# Altium PCB 2017_Carte_RUSH.PcbDoc
Units mil, origin at the board's own origin, x right, y up, seen from the top; angles counter-clockwise.
Board outline 1900 x 2250 mil, 4 copper layers (1-TOP, 2-SIGNAL, 3-GND, 4-BOT), stack 68 mil thick; 15 components, 8 nets, 50 pads, 79 vias.
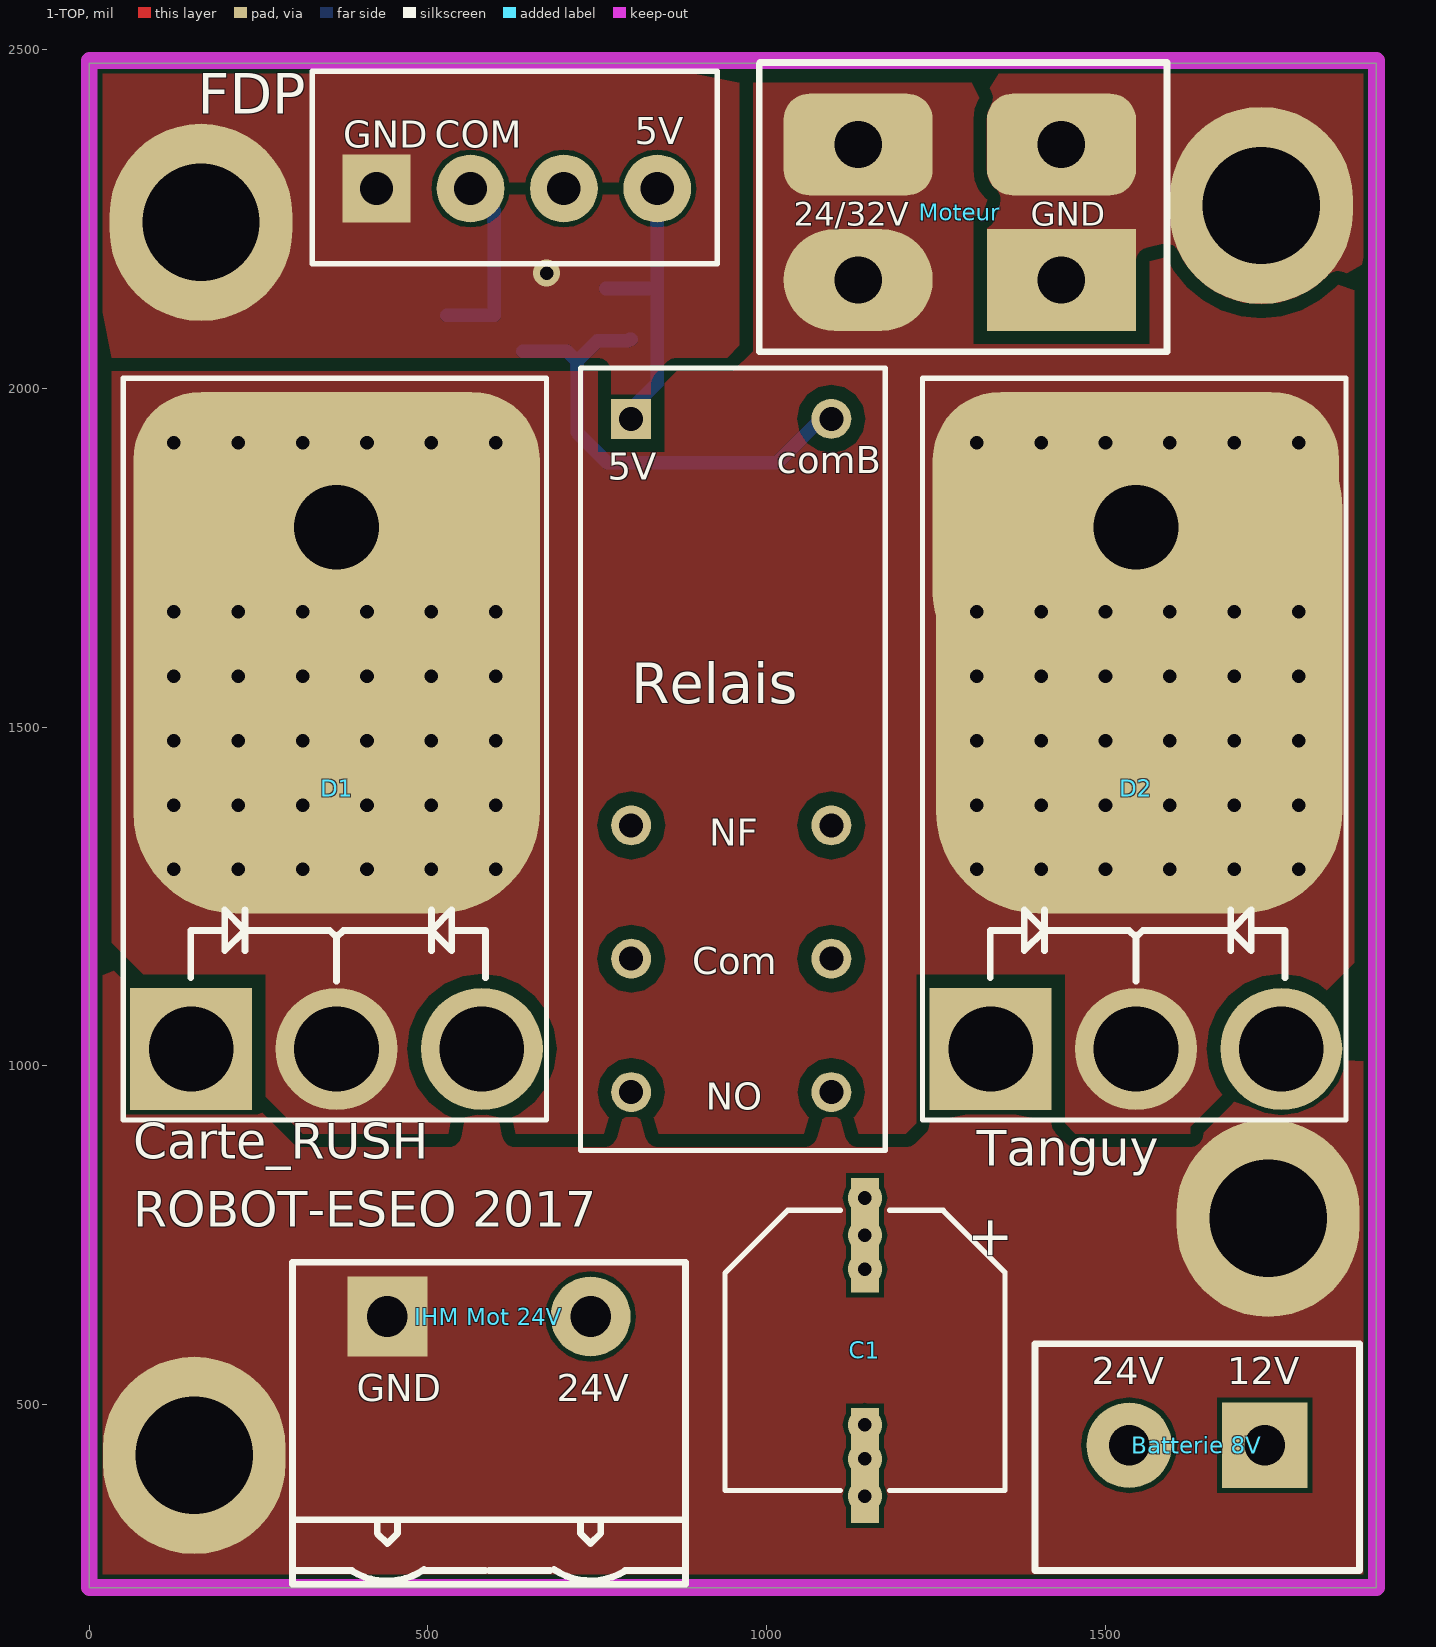
[diagram p0: 1-TOP view]
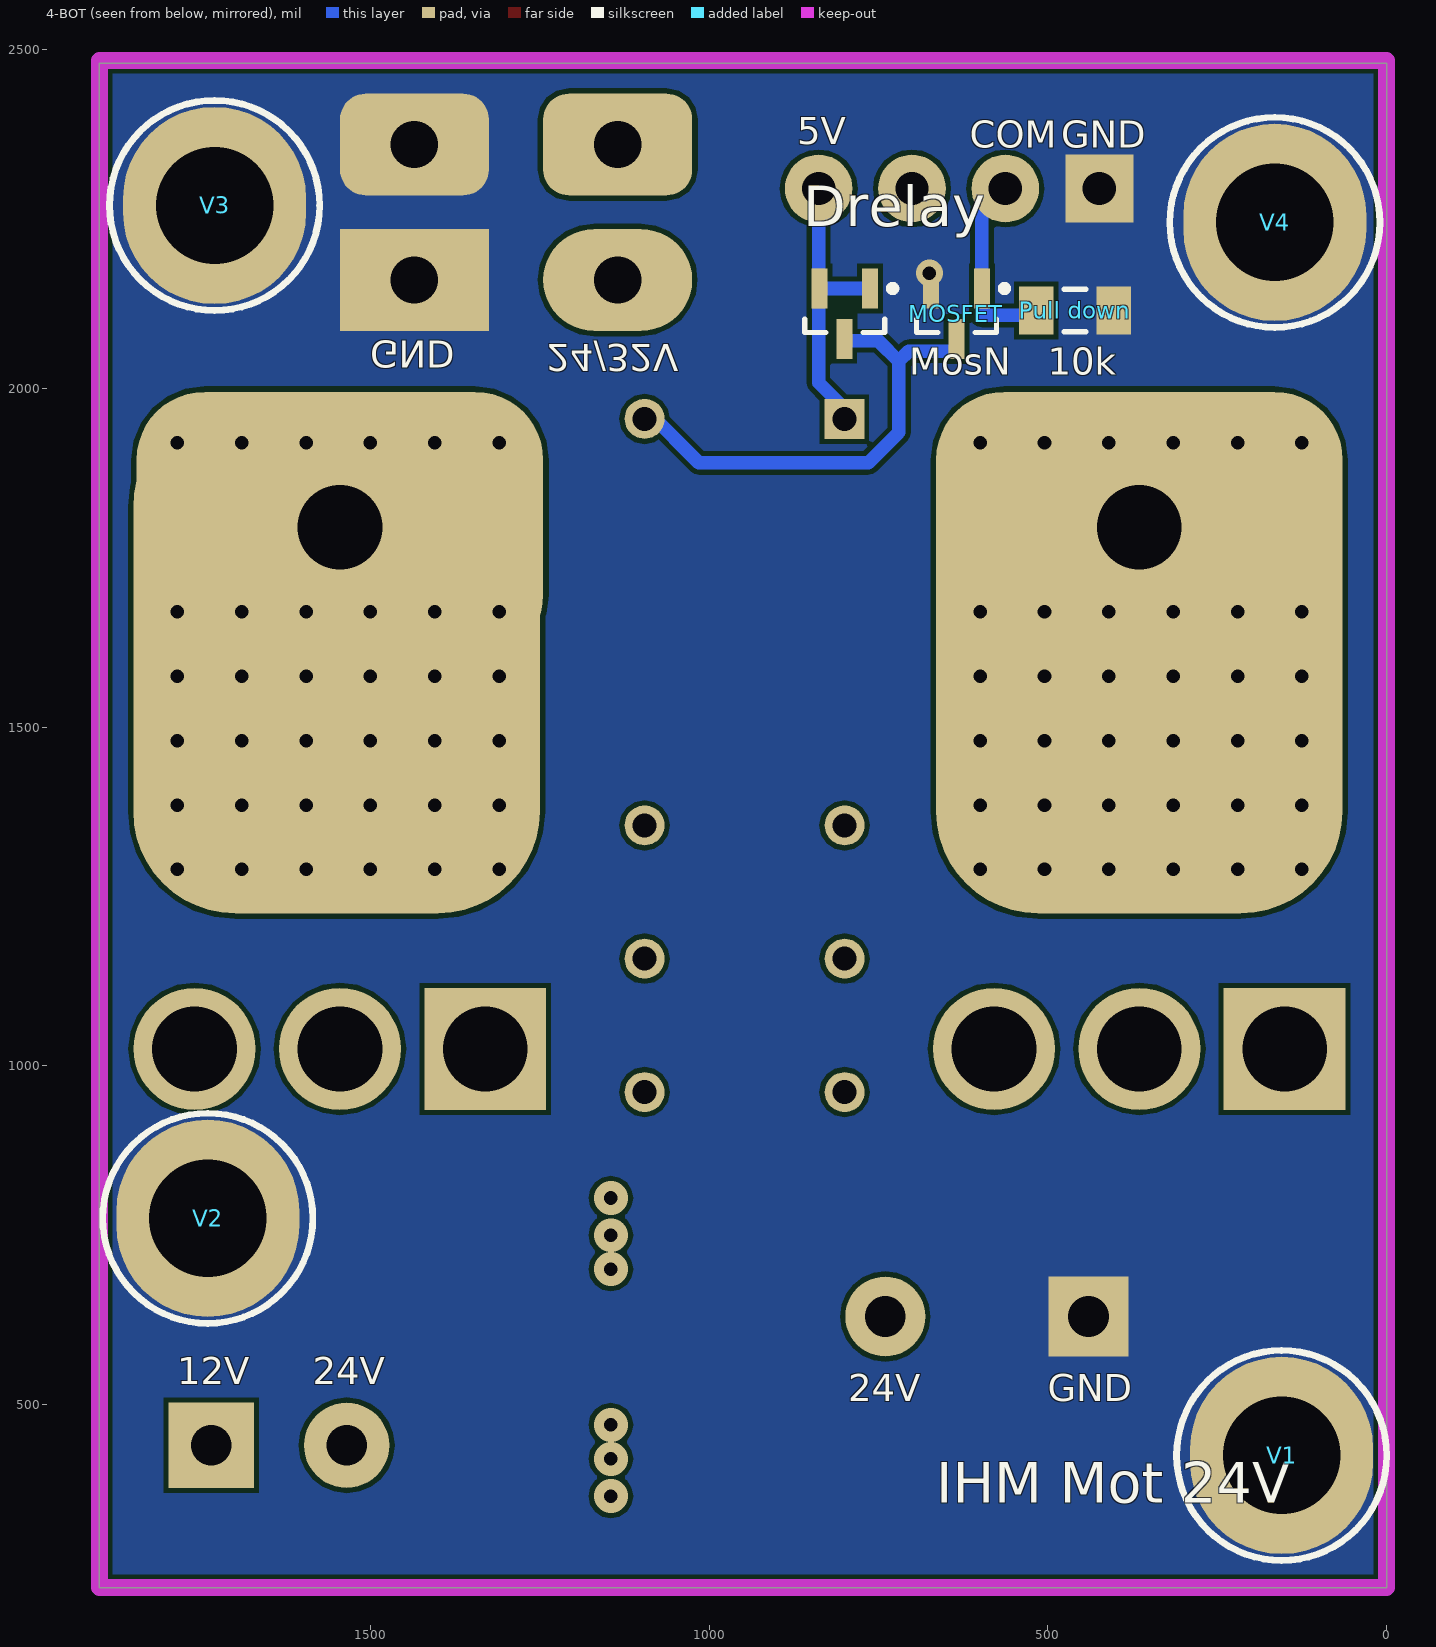
[diagram p1: 4-BOT view, seen from below]
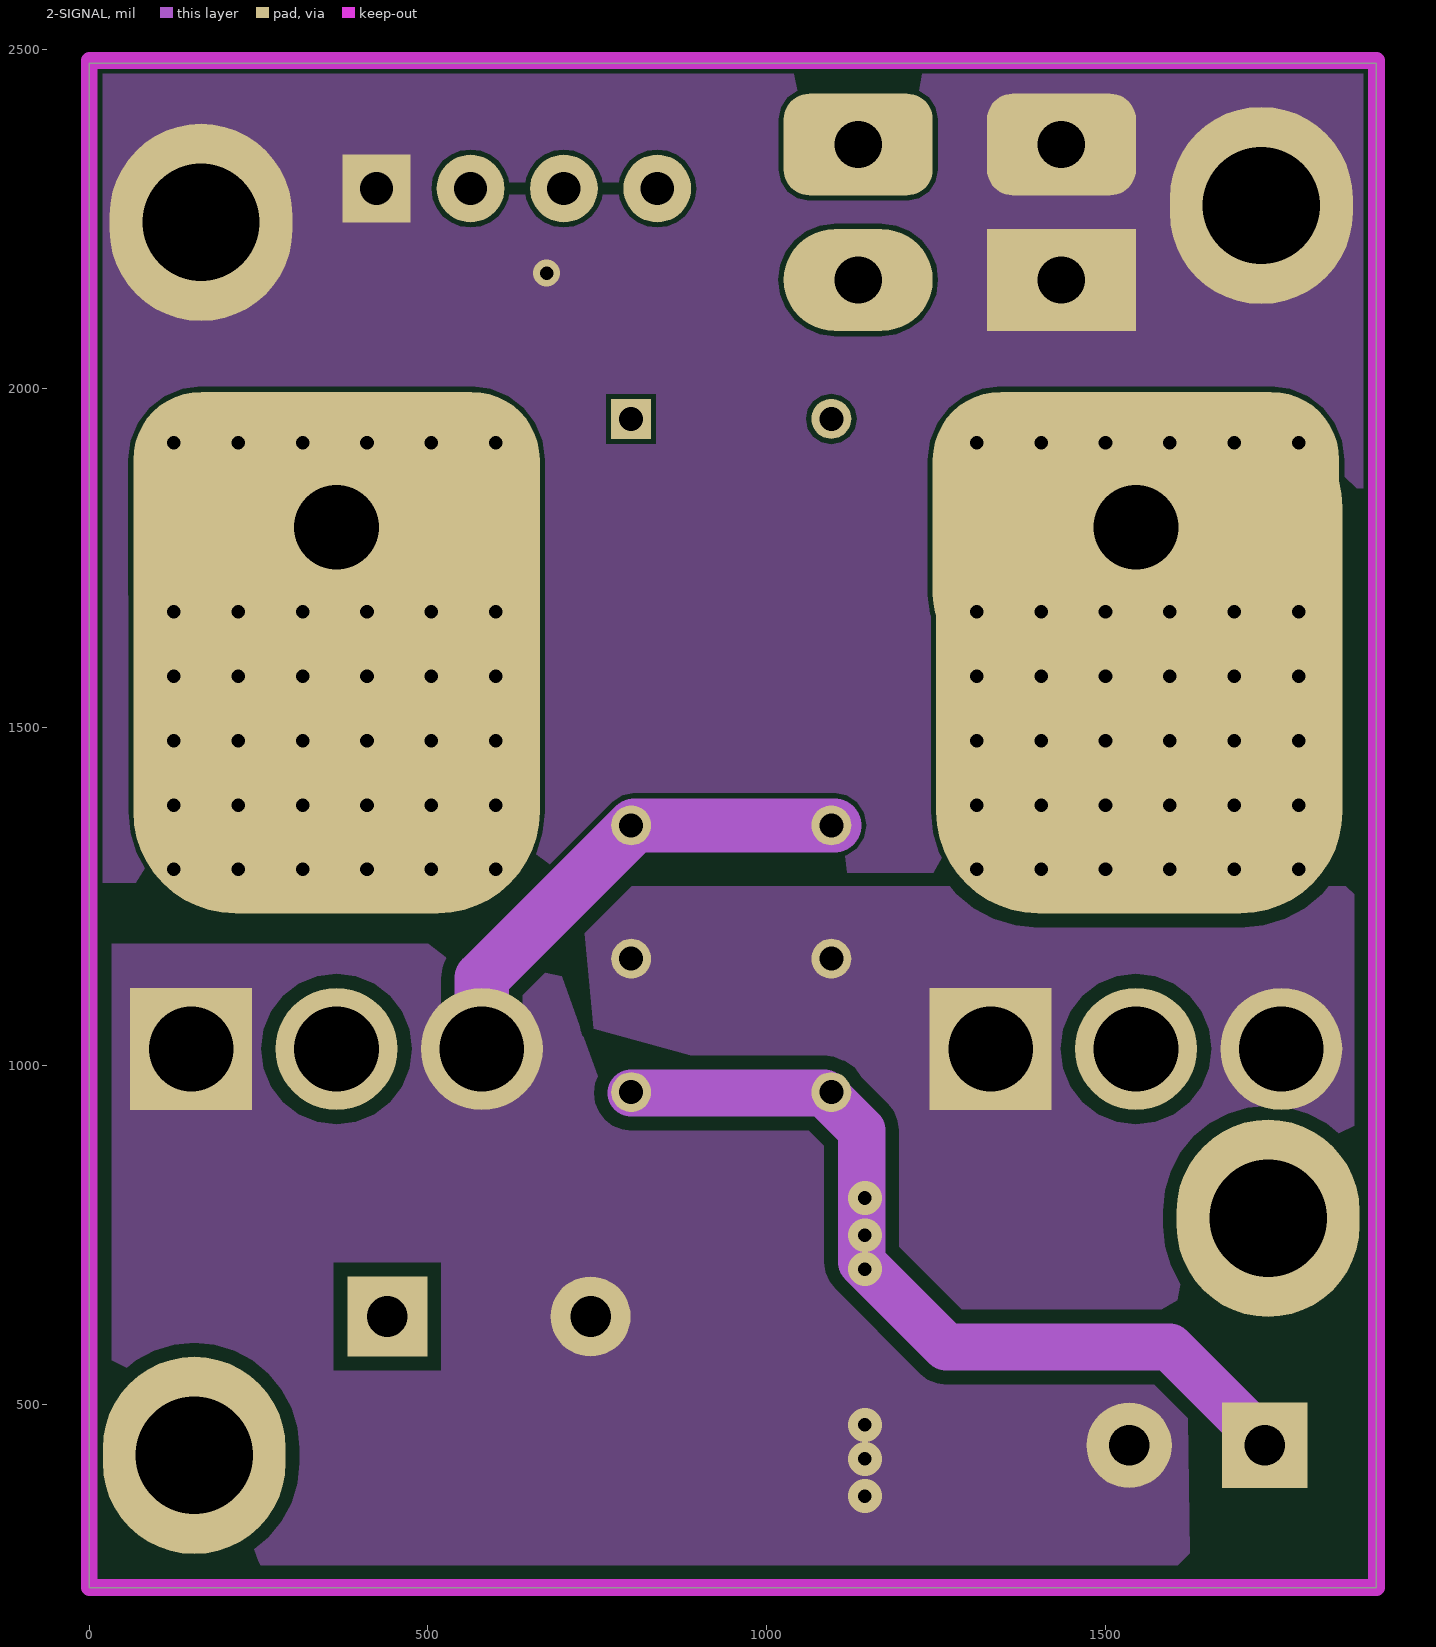
[diagram p2: 2-SIGNAL]
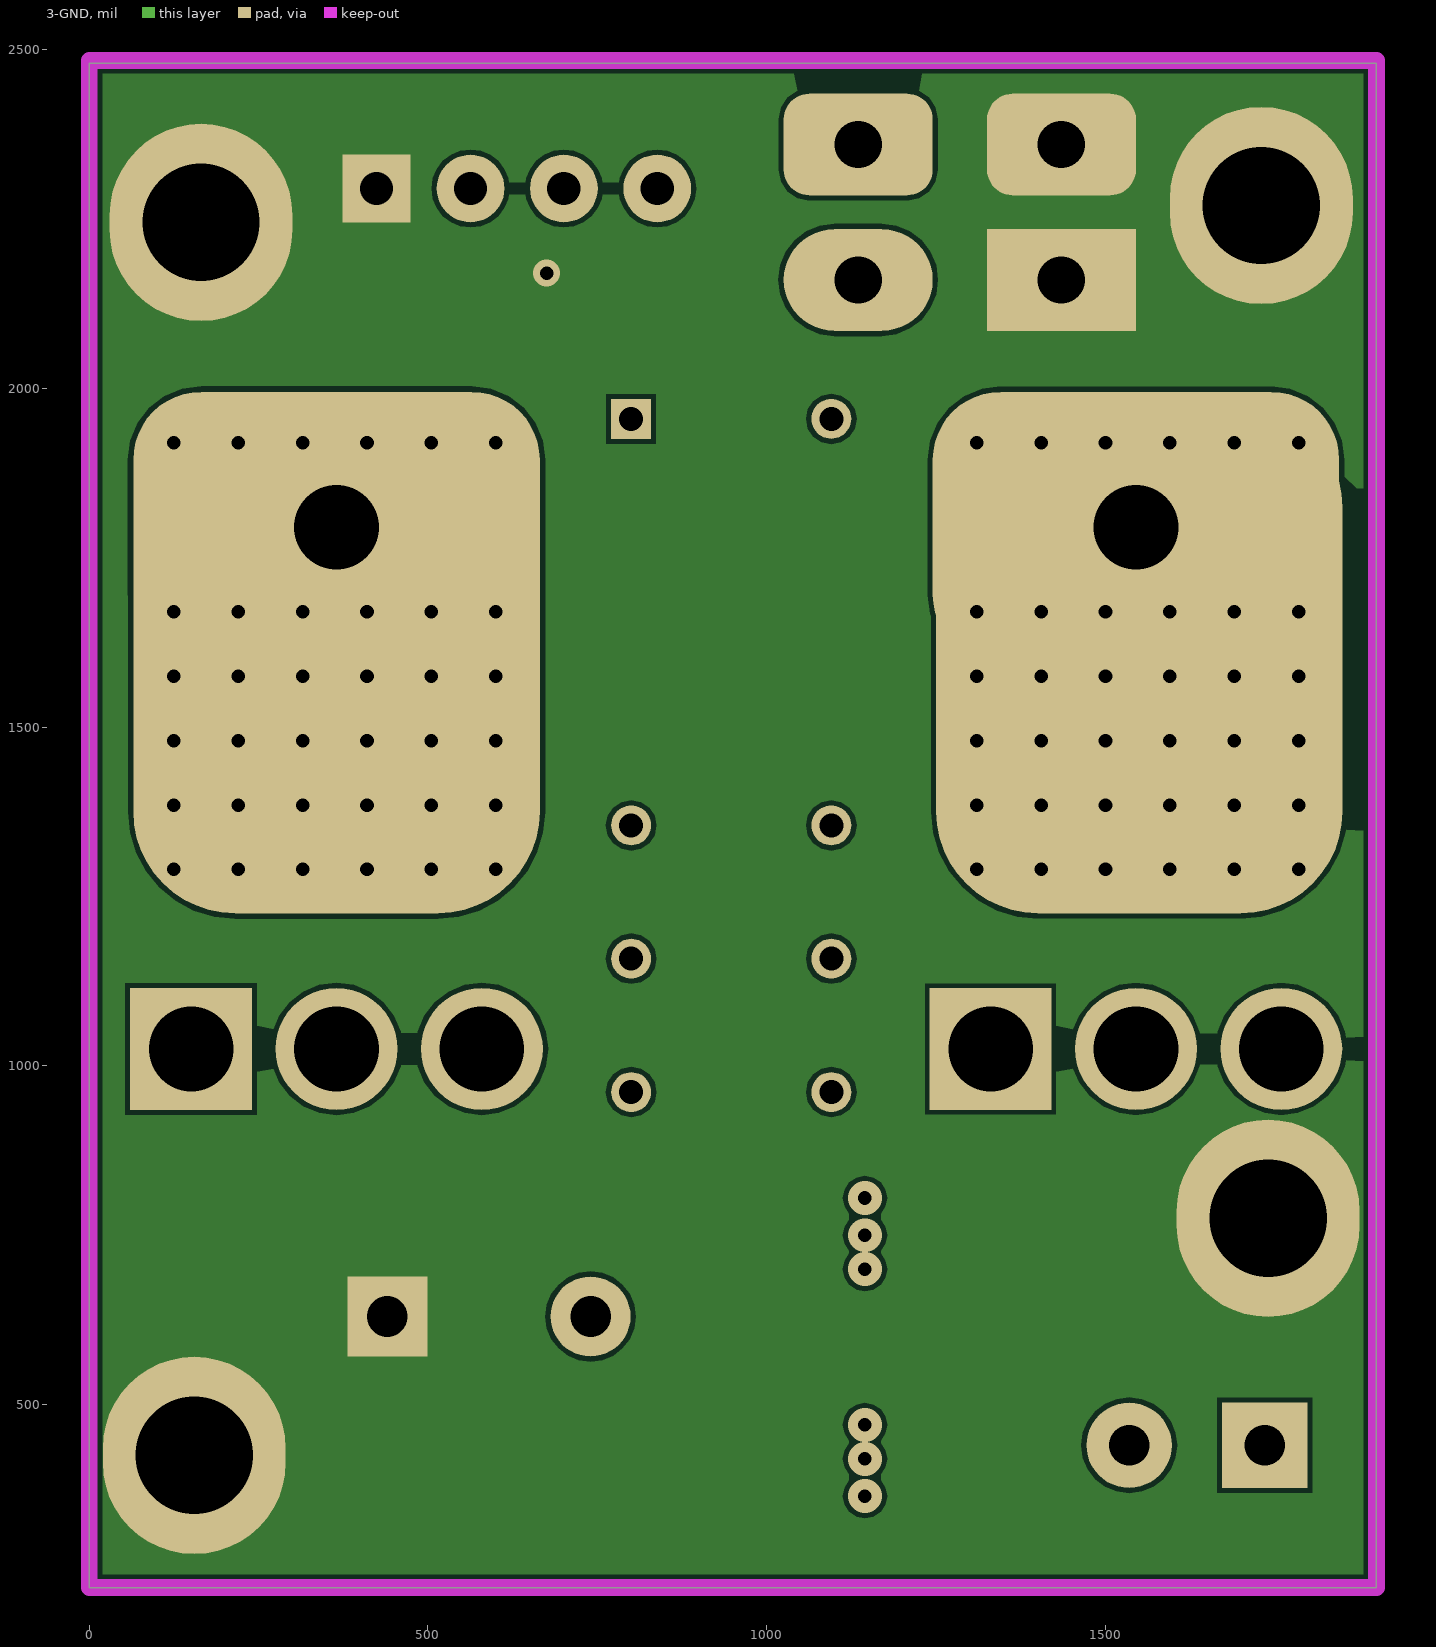
[diagram p3: 3-GND]
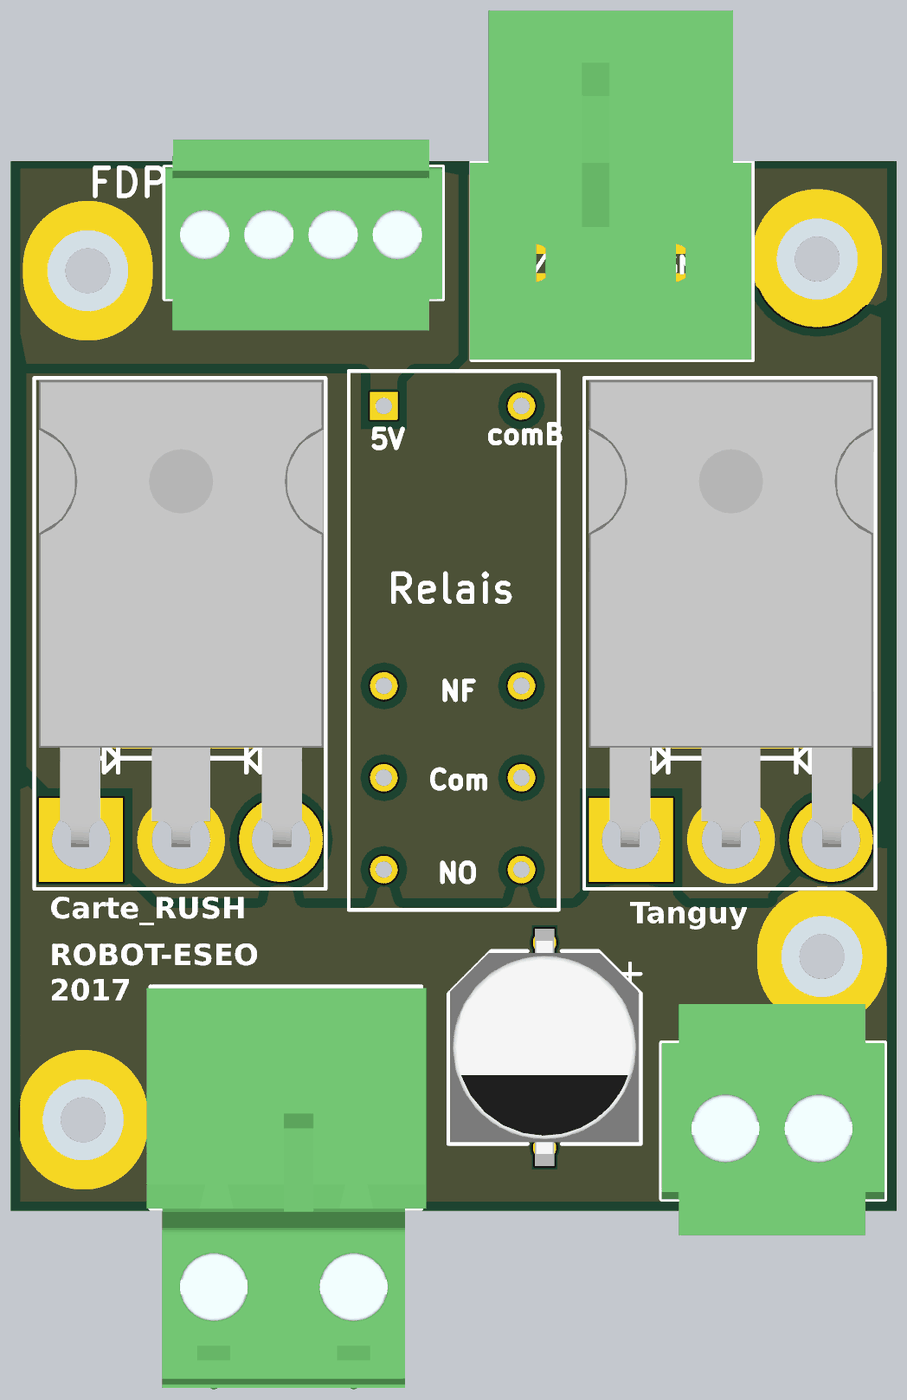
[diagram p4: 3D render of the assembled board from above, using the file's embedded part models]
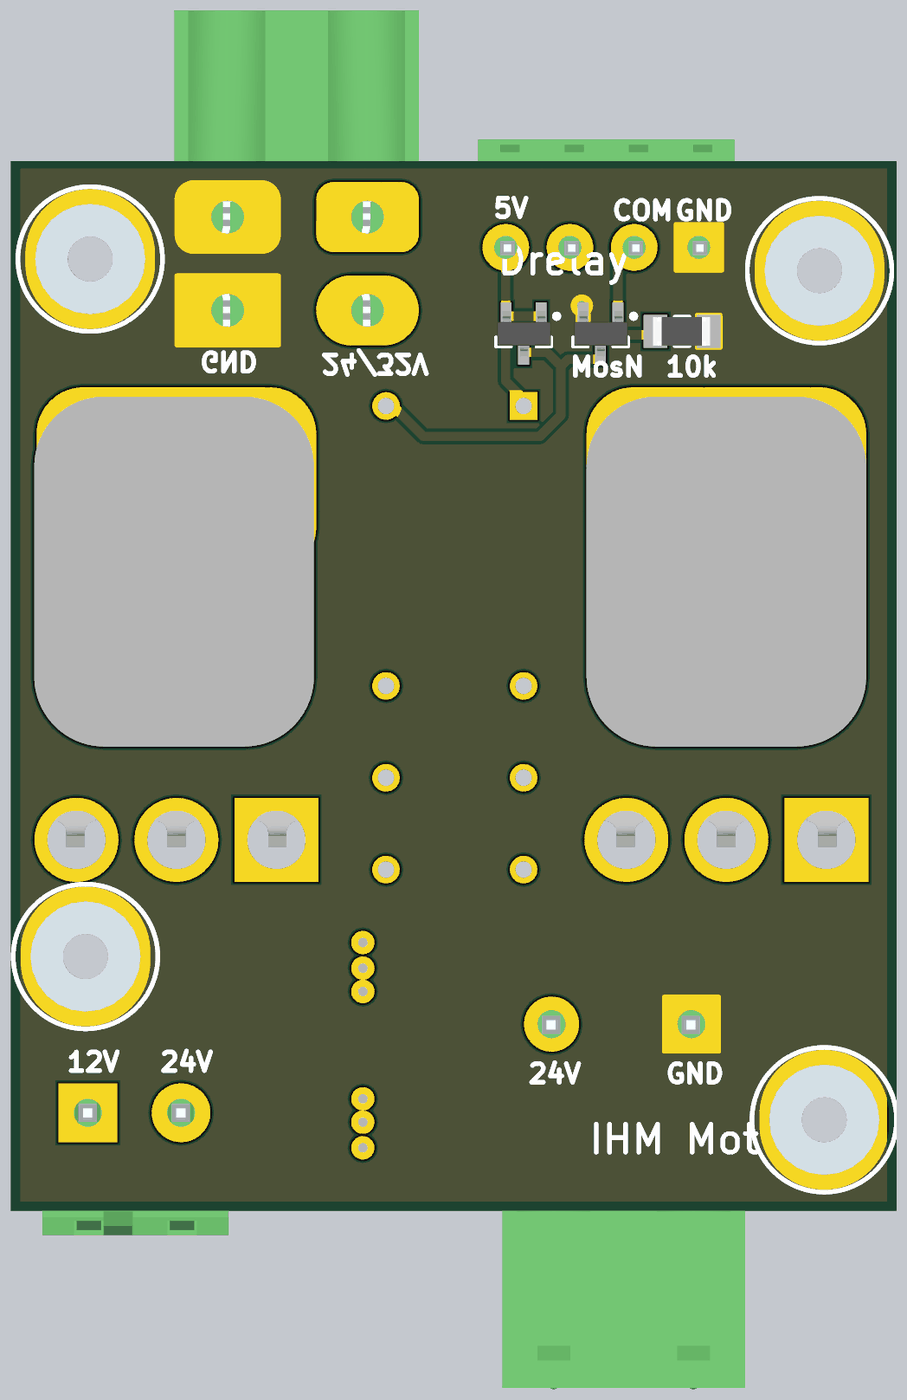
[diagram p5: 3D render of the assembled board from below, using the file's embedded part models]

## Layer stack, top to bottom
Top Solder: solder mask 0.4, Solder Resist, Dk 3.5
1-TOP: signal copper 1.4
Dielectric1: core 20.8, FR-4, Dk 4.8
2-SIGNAL: signal copper 1.4
Dielectric2: prepreg 20.8, FR-4, Dk 4.8
3-GND: signal copper 1.4
Dielectric3: core 20.8, FR-4, Dk 4.8
4-BOT: signal copper 1.4
Bottom Solder: solder mask 0.4, Solder Resist, Dk 3.5

## Board outline
1900,2480 0,2480 0,230 1900,230

## Design rules (kind name [scope] priority, off if disabled: settings)
Clearance Clearance_2 [InNamedPolygon('24V') Or  InNamedPolygon('32V') Or  InNamedPolygon('24V/32V MOT')] p1: gap=20
Clearance Clearance_1 [InNamedPolygon('4-GND') Or  InNamedPolygon('1-BATIHM') Or  InNamedPolygon('24V_BAT1') Or  InNamedPolygon('1-GND') Or  InNamedPolygon('3-GND') Or  InNamedPolygon('2-GND') Or  InNamedPolygon('24V_BAT1')] p2: gap=15
Clearance [All] p3: gap=7
FabricationTestpoint [(IsPad And (OnTopLayer Or OnBottomLayer))] p1: side=3 testpointundercomponent=TRUE minsize=40 maxsize=100 preferedsize=60 minholesize=0 maxholesize=40 preferedholesize=32 testpointgrid=1 allowsidetop=TRUE allowsidebottom=TRUE usegrid=TRUE gridtolerance=0.01
HoleSize [All] p1: absolutevalues=TRUE maxlimit=200 minlimit=1 maxpercent=80.000 minpercent=20.000
PlaneConnect [All] p1: planeconnectstyle=Direct reliefexpansion=20 reliefentries=4 reliefconductorwidth=10 reliefairgap=10
PolygonConnect [All] p1: connectstyle=Direct reliefconductorwidth=10 reliefentries=4 polygonreliefangle="90 Angle" airgapwidth=10
RoomDefinition 2017_Carte_RUSH [InComponentClass('2017_Carte_RUSH')] p1: confinementstyle=ConfineIn formatcopy=TRUE lockcomponents=FALSE outline 1945,155 2320,155 2320,425 1945,425
RoutingVias [All] p1: holewidth=28 width=50 viastyle="Through Hole" minholewidth=28 minwidth=50 maxholewidth=28 maxwidth=50
SilkToSolderMaskClearance SilkscreenOverComponentPads [IsPad] p1: minsilkscreentomaskgap=10 clearancetoexposedcopper=TRUE
SolderMaskExpansion [All] p1: expansion=4
Width [All] p1: maxlimit=200 minlimit=10 preferedwidth=15
25 further rules are at their usual default settings.

## Components (designator, comment, footprint, x,y, rotation, side; value= is the part's Value field where it differs from the comment)
"Batterie 8V" "BORNIER2" BORNIER_2V_5.08MM 1535,440 r0 top
C1 "470uF/35V" C_10.3mm_G 1145,580 r270 top
D1 "Diode Shottky double STPS60L30CW" TO247 365,1025 r0 top
D2 "Diode Shottky double STPS60L30CW" TO247 1545,1025 r0 top
Drelay "Diode Shottky double  BAT54A" SOT23-3N 800,2110 r270 bottom
FDP "BORNIER_4V_3.5MM" BORNIER_4V_3.5MM 425,2295 r0 top
"IHM Mot 24V" "FEMELLE A SOUDER 7.62mm" BORNIER2_FEM_COUDE 440,630 r0 top
MOSFET "Transistor MOSFET-N" SOT23-3N 635,2110 r270 bottom
Moteur "MALE A SOUDER 7.62mm" BORNIER2_FEM_HORIZ 1435,2160 r180 top
"Pull down" "10K" R1206_N 460,2115 r0 bottom
Relais "Relay-SPST_2pins_par_sorties" RELAY_TECONNECTIVITY 800,1955 r270 top
V1 "" ENTRETOISE_CMS 155,425 r180 bottom
V2 "" ENTRETOISE_CMS 1740,775 r180 bottom
V3 "" ENTRETOISE_CMS 1730,2270 r180 bottom
V4 "" ENTRETOISE_CMS 165,2245 r180 bottom

## Footprints (in the part's own frame and the unit in brackets; to place one, negate y for a bottom-side part, rotate by r counter-clockwise, add the part's x,y. Pads: shape width x height; smd on the part's side, far side on the other; paste and mask are expansions set on the pad)
BORNIER2_FEM_COUDE [mm] "Connector; Header; 2 Position; Right Angle; Female; Pin Spacing=5.08mm Green"
  rect 3x3 hole 1.524: 1(0,0)
  round 3 hole 1.524: 2(7.62,0)
  silkscreen extent -3.56,-10.03 11.18,2.03, body extent -3.78,-19.88 11.46,1.96, height 15.2
BORNIER2_FEM_HORIZ [mil] "Connector; Header; 2 Position; Right Angle; Female; Pin Spacing=7.62mm Green"
  rect 220x150 hole 70: 1(0,0)
  rrect50% 220x150 hole 70: 1(0,-200) 2(300,-200)
  oval 220x150 hole 70: 2(300,0)
  silkscreen extent -156,-321 446,106, body extent -154,-643 450,105, height 426
BORNIER_2V_5.08MM [mm] "Connector; Header; 2 Position; screw terminal blocks, Pin Spacing=5.08mm"
  rect 3.2x3.2 hole 1.524: 1(5.08,0)
  round 3.2 hole 1.524: 2(0,0)
  silkscreen extent -3.53,-4.7 8.64,3.81, body extent -3.53,-6.68 8.63,5.92, height 29.9
BORNIER_4V_3.5MM [mm]
  rect 2.54x2.54 hole 1.25: 1(-0.025,0)
  round 2.54 hole 1.25: 2(3.5,0) 3(7,0) 4(10.5,0)
  silkscreen extent -2.44,-2.82 12.75,4.4, body extent -2.39,-4.51 12.71,5.89, height 22.31
C_10.3mm_G [mm] "Capacitor Aluminium Electrolytic,Caze G, IPC Medium Density"
  rect 4.3x1.05 smd: 1(-4.318,0) 2(4.318,0)
  silkscreen extent -5.25,-5.25 5.25,5.25, body extent -5.8,-5.25 5.8,5.25, height 10.21
ENTRETOISE_CMS [mm] "Entretoise CMS Wurth trou 4.4mm"
  oval 6.858x7.4 hole 4.4: 1(0,0)
  silkscreen extent -3.94,-3.94 3.94,3.94, body extent -2.99,-3 2.99,2.98, height 3
R1206_N [mm] "Chip Resistor, Body 3.2x1.6mm, IPC Medium Density"
  rect 1.3x1.8 smd: 1(-1.45,0) 2(1.45,0)
  silkscreen extent -0.4,-0.8 0.4,0.8, body extent -1.68,-0.87 1.68,0.87, height 0.71
RELAY_TECONNECTIVITY [mm] "OZ-SS-105LM1,200"
  rect 1.5x1.5 hole 0.9: 1(0,0)
  round 1.5 hole 0.9: 2(15.24,0) 3(20.24,0) 4(25.24,0) 5(25.24,7.5) 6(20.24,7.5) 7(15.24,7.5) 8(0,7.5)
  silkscreen extent -1.91,-1.91 27.43,9.53
SOT23-3N [mm] "SOT23, 3-Leads, Body 2.9x1.3mm, Pitch 0.95mm, Lead Span 2.5mm, IPC Medium Density"
  rect 1.5x0.6 smd: 1(-0.95,0.95) 2(-0.95,-0.95) 3(0.95,0)
  silkscreen extent -1.07,-1.5 0.7,1.92, body extent -1.24,-1.5 1.23,1.5, height 1.1
TO247 [mil] "TO, Thru-Hole, Vertical, Heatsink Mounted; 3 In-Line Leads"
  rect 180x180 hole 125: 1(-214.5,0)
  round 180 hole 125: 2(0,0) 3(214.5,0)
  rrect50% 600x400 hole 125: 4(0,770)
  silkscreen extent -315,-105 310,990, body extent -305,-15 305,985, height 197

## Part data
"Batterie 8V": "Terminal blocks, 2 pins, pitch=5mm"
C1: library part "Condensateur Polarise CMS", "Polarized Capacitor"
D1 D2 Drelay: "DIODE SCHOTTKY DOUBLE"
"IHM Mot 24V" Moteur: library part BORNIER2, "Terminal blocks, 2 pins, pitch=5mm"
MOSFET: "N-Channel MOSFET"
"Pull down": library part Resistor, "Resistor"
Relais: "OZ-SS-105LM1,200 - Single-Pole Single-Throw Relay"
V1 V2 V3 V4: library part "Entretoise WURTH CMS", "Entretoise Wurth"

## Free pads (board coordinates)
  rrect50% 600x750 smd: 0(365,1600) 0(1550,1600)
  rrect50% 600x750 on Mid1: 0(365,1600) 0(1550,1600)
  rrect50% 600x750 smd far side: 0(365,1600) 0(1550,1600)
  rrect50% 600x750 on Mid2: 0(365,1600) 0(1550,1600)

## Via types
v1: diameter 50, hole 20, 1-TOP to 4-BOT, 78 vias
v2: diameter 40, hole 20, 1-TOP to 4-BOT, 1 vias

## Nets (pads, with @x,y where several pads share a name; then routed paths per layer and width w, separated by ;. In a path a pad name is that pad's centre, name@x,y a point inside that pad or via, vN(x,y) a via of type N, cw(c..) or ccw(c..) an arc to the next point about the centre after c; other vN are vias at no path point)
5V: Drelay.1 Drelay.2 FDP.4 Relais.1 | length 415.9
  4-BOT w20: Drelay.1@762.4,2147.4 Drelay.1 Drelay.2 ; Relais.1@800,1970 838.39,2008.39 FDP.4
24_OU_32: D2.1 D2.3 Relais.3 Relais.6
24V: "Batterie 8V.2" "IHM Mot 24V.2" C1.2 D1.1 D1.3 Relais.2 Relais.7 | length 718.4
  2-SIGNAL w80: D1.3 579.5,1129.5 805,1355 Relais.7 Relais.7@1100,1355
  other v1: 1145,365 1145,420 1145,470
32V: "Batterie 8V.1" C1.1 Relais.4 Relais.5 | length 1276.7
  2-SIGNAL w70: Relais.4@800,960 1085,960 1140,905 1140,710 1265,585 1595,585 1745,435
  other v1: 1145,700 1145,750 1145,805
CARTE_ACTIONNEUR: "Pull down.2" FDP.2 MOSFET.1 | length 271.1
  4-BOT w20: 527.4,2107.6 597.6,2107.6 597.6,2262.4 FDP.2@565,2295
GND: "IHM Mot 24V.1" "Pull down.1" FDP.1 MOSFET.2 Moteur.1 V1.1 V2.1 V3.1 V4.1
  other v2: 675,2170
NetDrelay_3: Drelay.3 MOSFET.3 Relais.8 | length 700.7
  4-BOT w20: MOSFET.3@640,2055 705,2055 720,2040 ; Drelay.3@795,2070 750,2070 720,2040 ; Drelay.3@797.6,2072.6 Drelay.3 ; Relais.8@1090,1965 1015,1890 765,1890 720,1935 720,2040
VPUISSANCE: D1.2 D1.4 D2.2 D2.4 Moteur.2 pad.0
  other v1: 125,1290 220,1290 315,1290 410,1290 505,1290 600,1290 1310,1290 1405,1290 1500,1290 1595,1290 1690,1290 1785,1290 125,1385 220,1385 315,1385 410,1385 505,1385 600,1385 1310,1385 1405,1385 1500,1385 1595,1385 1690,1385 1785,1385 125,1480 220,1480 315,1480 410,1480 505,1480 600,1480 1310,1480 1405,1480 1500,1480 1595,1480 1690,1480 1785,1480 125,1575 220,1575 315,1575 410,1575 505,1575 600,1575 1310,1575 1405,1575 1500,1575 1595,1575 1690,1575 1785,1575 125,1670 220,1670 315,1670 410,1670 505,1670 600,1670 1310,1670 1405,1670 1500,1670 1595,1670 1690,1670 1785,1670 125,1920 220,1920 315,1920 410,1920 505,1920 600,1920 1310,1920 1405,1920 1500,1920 1595,1920 1690,1920 1785,1920
pads on no net: FDP.3

## Polygon pours and split planes (outlines as drawn)
GND on 1-TOP "GND" (solid, pour order 25): 10,2495 1885,2495 1885,230 0.83,230
VPUISSANCE on 1-TOP "24V/32V MOT" (solid, pour order 21): 980,2485 980,2055 950,2025 30,2025 30,1185 315,900 1625,900 1625,910 1880,1165 1895,1180 1895,2485
GND on 2-SIGNAL "GND" (solid, pour order 27): 10,2495 1895,2495 1895,1270 12.56,1270
24_OU_32 on 2-SIGNAL "32V" (solid, pour order 15): 1855,1265 1875,1245 1875,810 1565,630 1360,590 1195,655 1105,955 745,1055 725,1265
24V on 2-SIGNAL "24V" (solid, pour order 17): 15,1180 680,1180 765,945 1095,935 1130,750 1270,600 1620,600 1625,230 10.94,230
GND on 3-GND "GND" (solid, pour order 19): 15,2485 1890,2485 1890,230 5.89,230
GND on 4-BOT "GND" (solid, pour order 9): 5,2495 1895,2495 1895,230 5,230

## Keep-outs
Keep-Out Layer:
  lines w25: 0,230 0,2484 1900,2484 1900,230 0,230

## Silkscreen, mask and mechanical layers (free items; w line width, h text height)
Top Overlay:
  text "5V" at 805,2360 h40
  text "GND" at 375,2355 h40
  text "COM" at 510,2355 h40
  text "24/32V" at 1040,2240 h35
  text "GND" at 1390,2240 h35
  text "comB" at 1015,1875 h40
  text "5V" at 765,1865 h40
  text "NF" at 915,1325 h40
  text "Com" at 890,1135 h40
  text "NO" at 910,935 h40
  text "Carte_RUSH" at 65,845 h90
  text "Tanguy" at 1310,835 h90
  text "ROBOT-ESEO 2017" at 65,745 h90
  text "24V" at 1480,530 h40
  text "12V" at 1680,530 h40
  text "GND" at 395,505 h40
  text "24V" at 690,505 h40
Bottom Overlay:
  text "5V" at 870,2360 h40
  text "GND" at 480,2355 h40
  text "COM" at 615,2355 h40
  text "GND" at 1500,2070 h40 r180
  text "24/32V" at 1240,2065 h40 r180
  text "10k" at 500,2020 h40
  text "MosN" at 705,2020 h40
  text "24V" at 1585,530 h40
  text "12V" at 1785,530 h40
  text "GND" at 500,505 h40
  text "24V" at 795,505 h40

## Text inside footprints (layer, text, board x,y; h text height)
C1: Top Overlay "+" at 1305,780 h60 r270